# Altium PCB PCB1.PcbDoc
Units mil, origin at the board's own origin, x right, y up, seen from the top; angles counter-clockwise.
Board outline 6000 x 4000 mil, 2 copper layers (Top Layer, Bottom Layer); 223 components, 319 nets, 940 pads, 41 vias.
Unrouted connection lines stored in the file: 552.
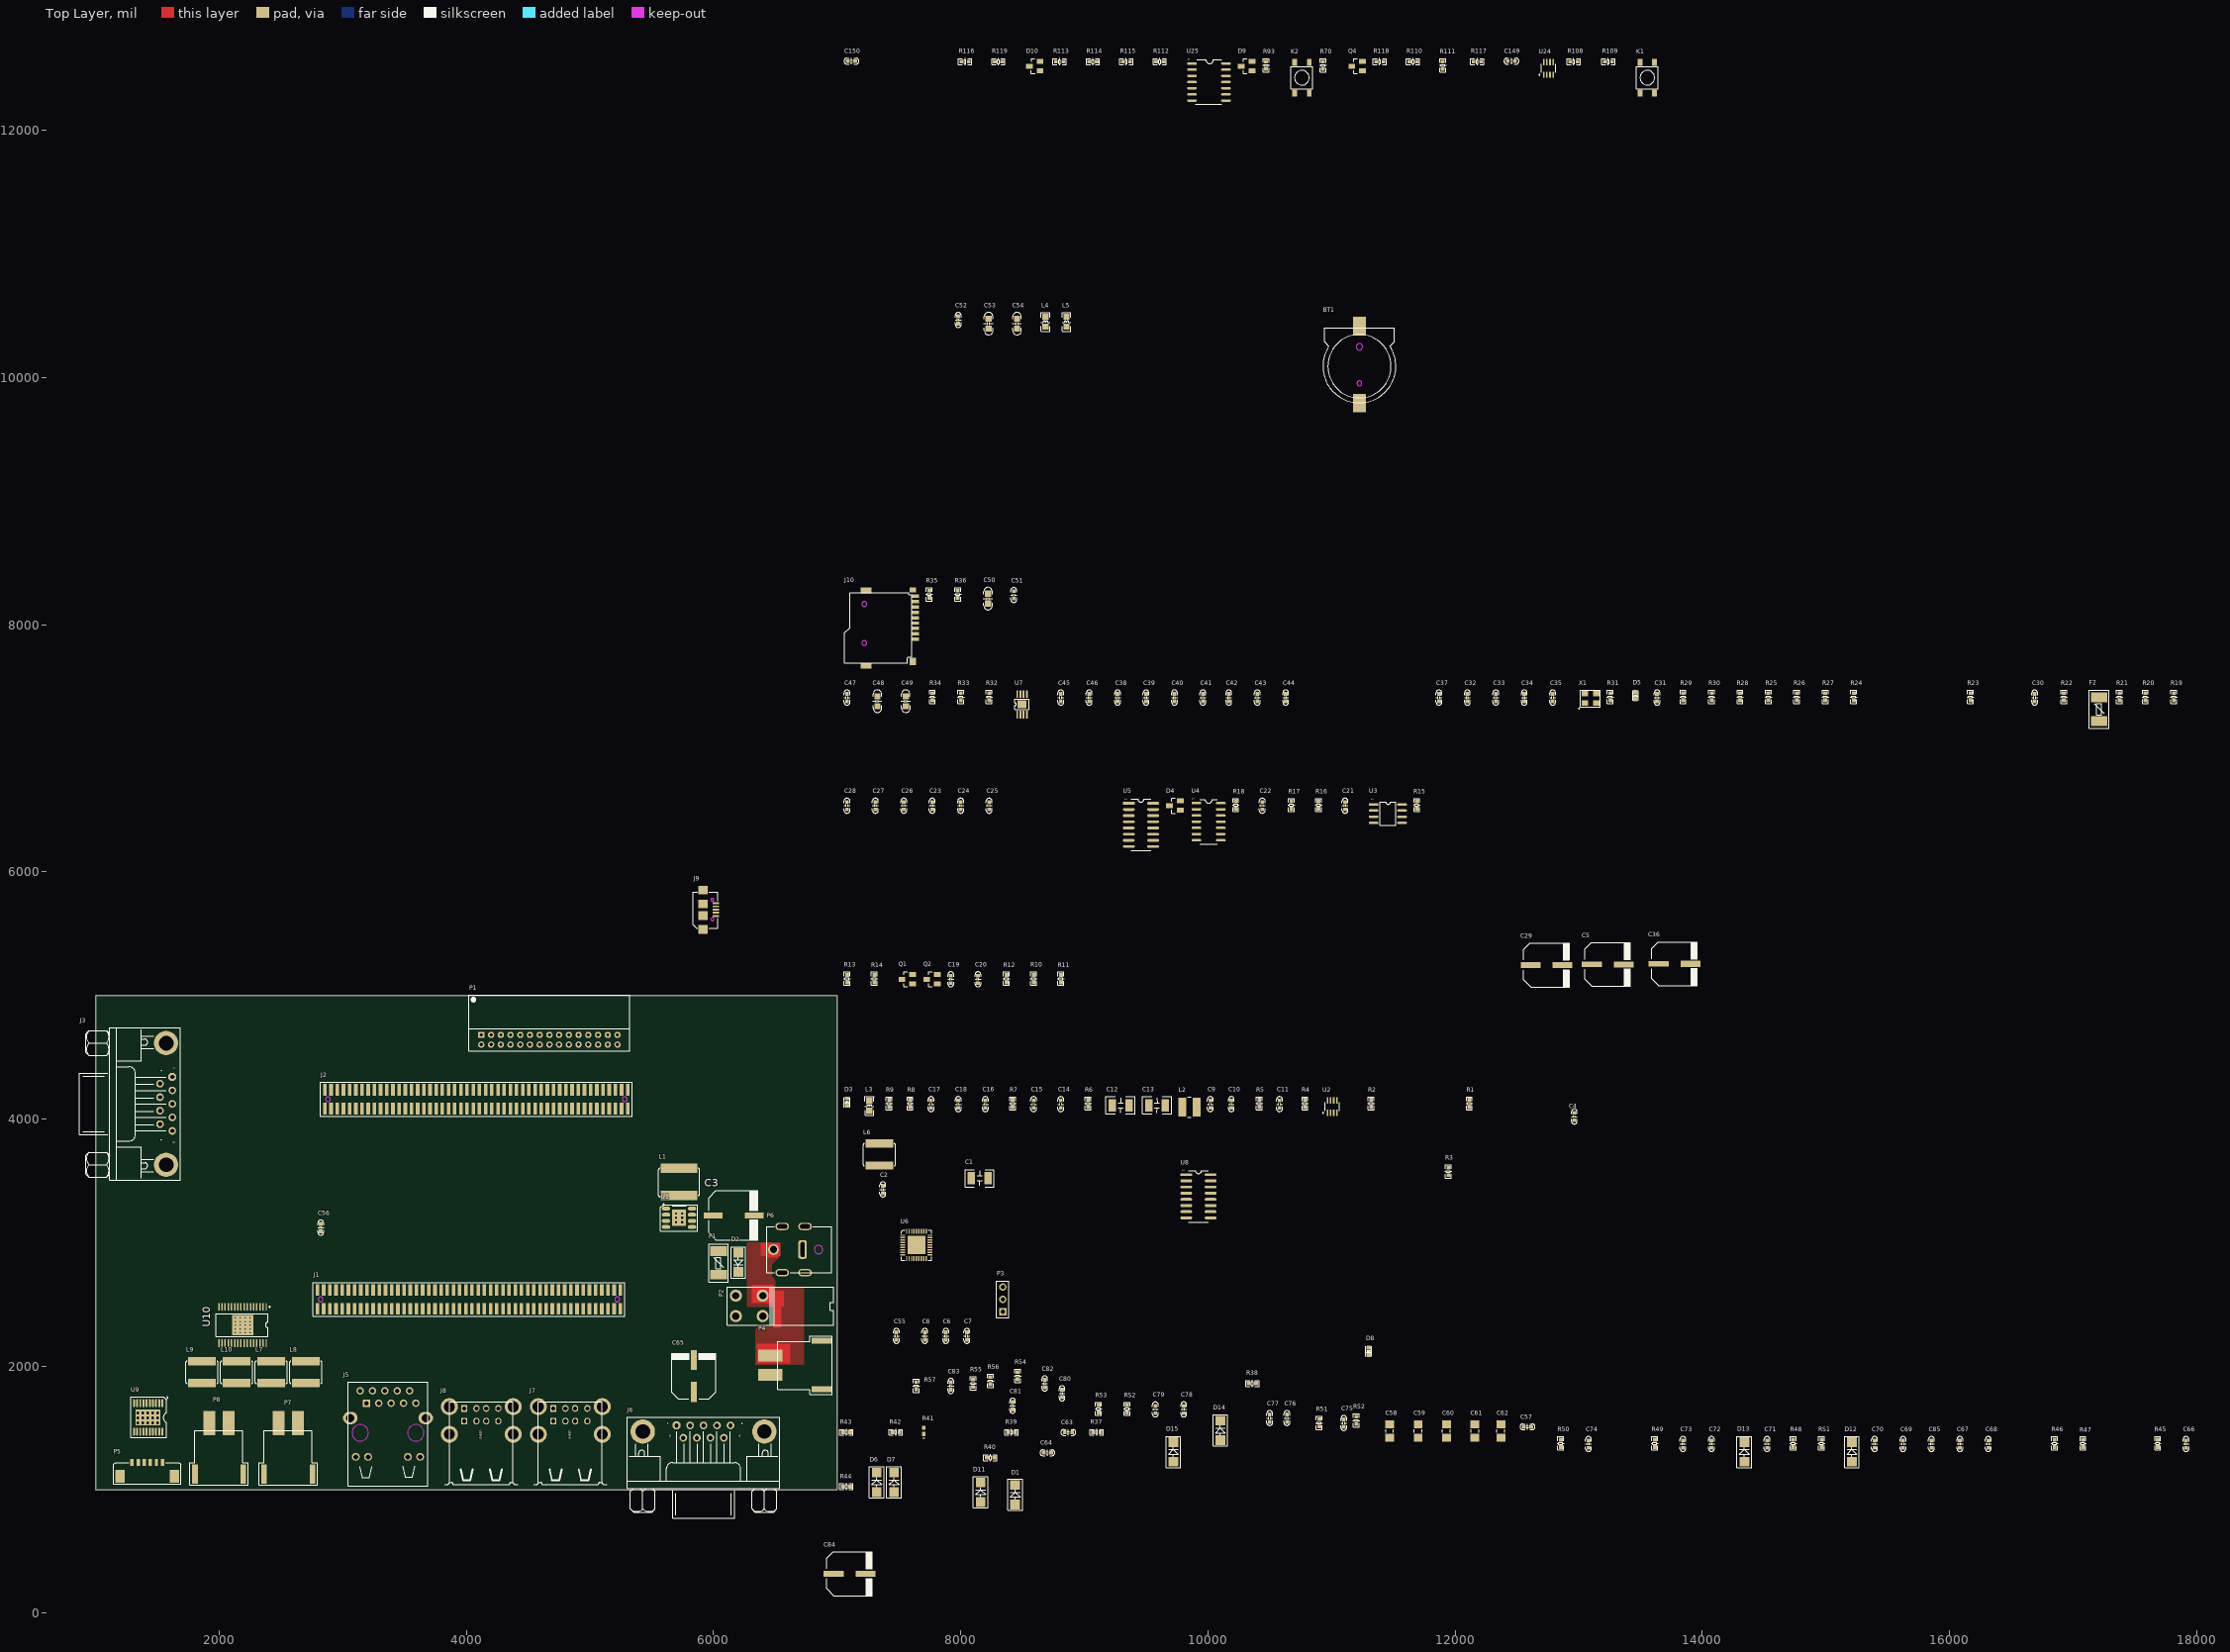
[diagram p0: Top Layer view]
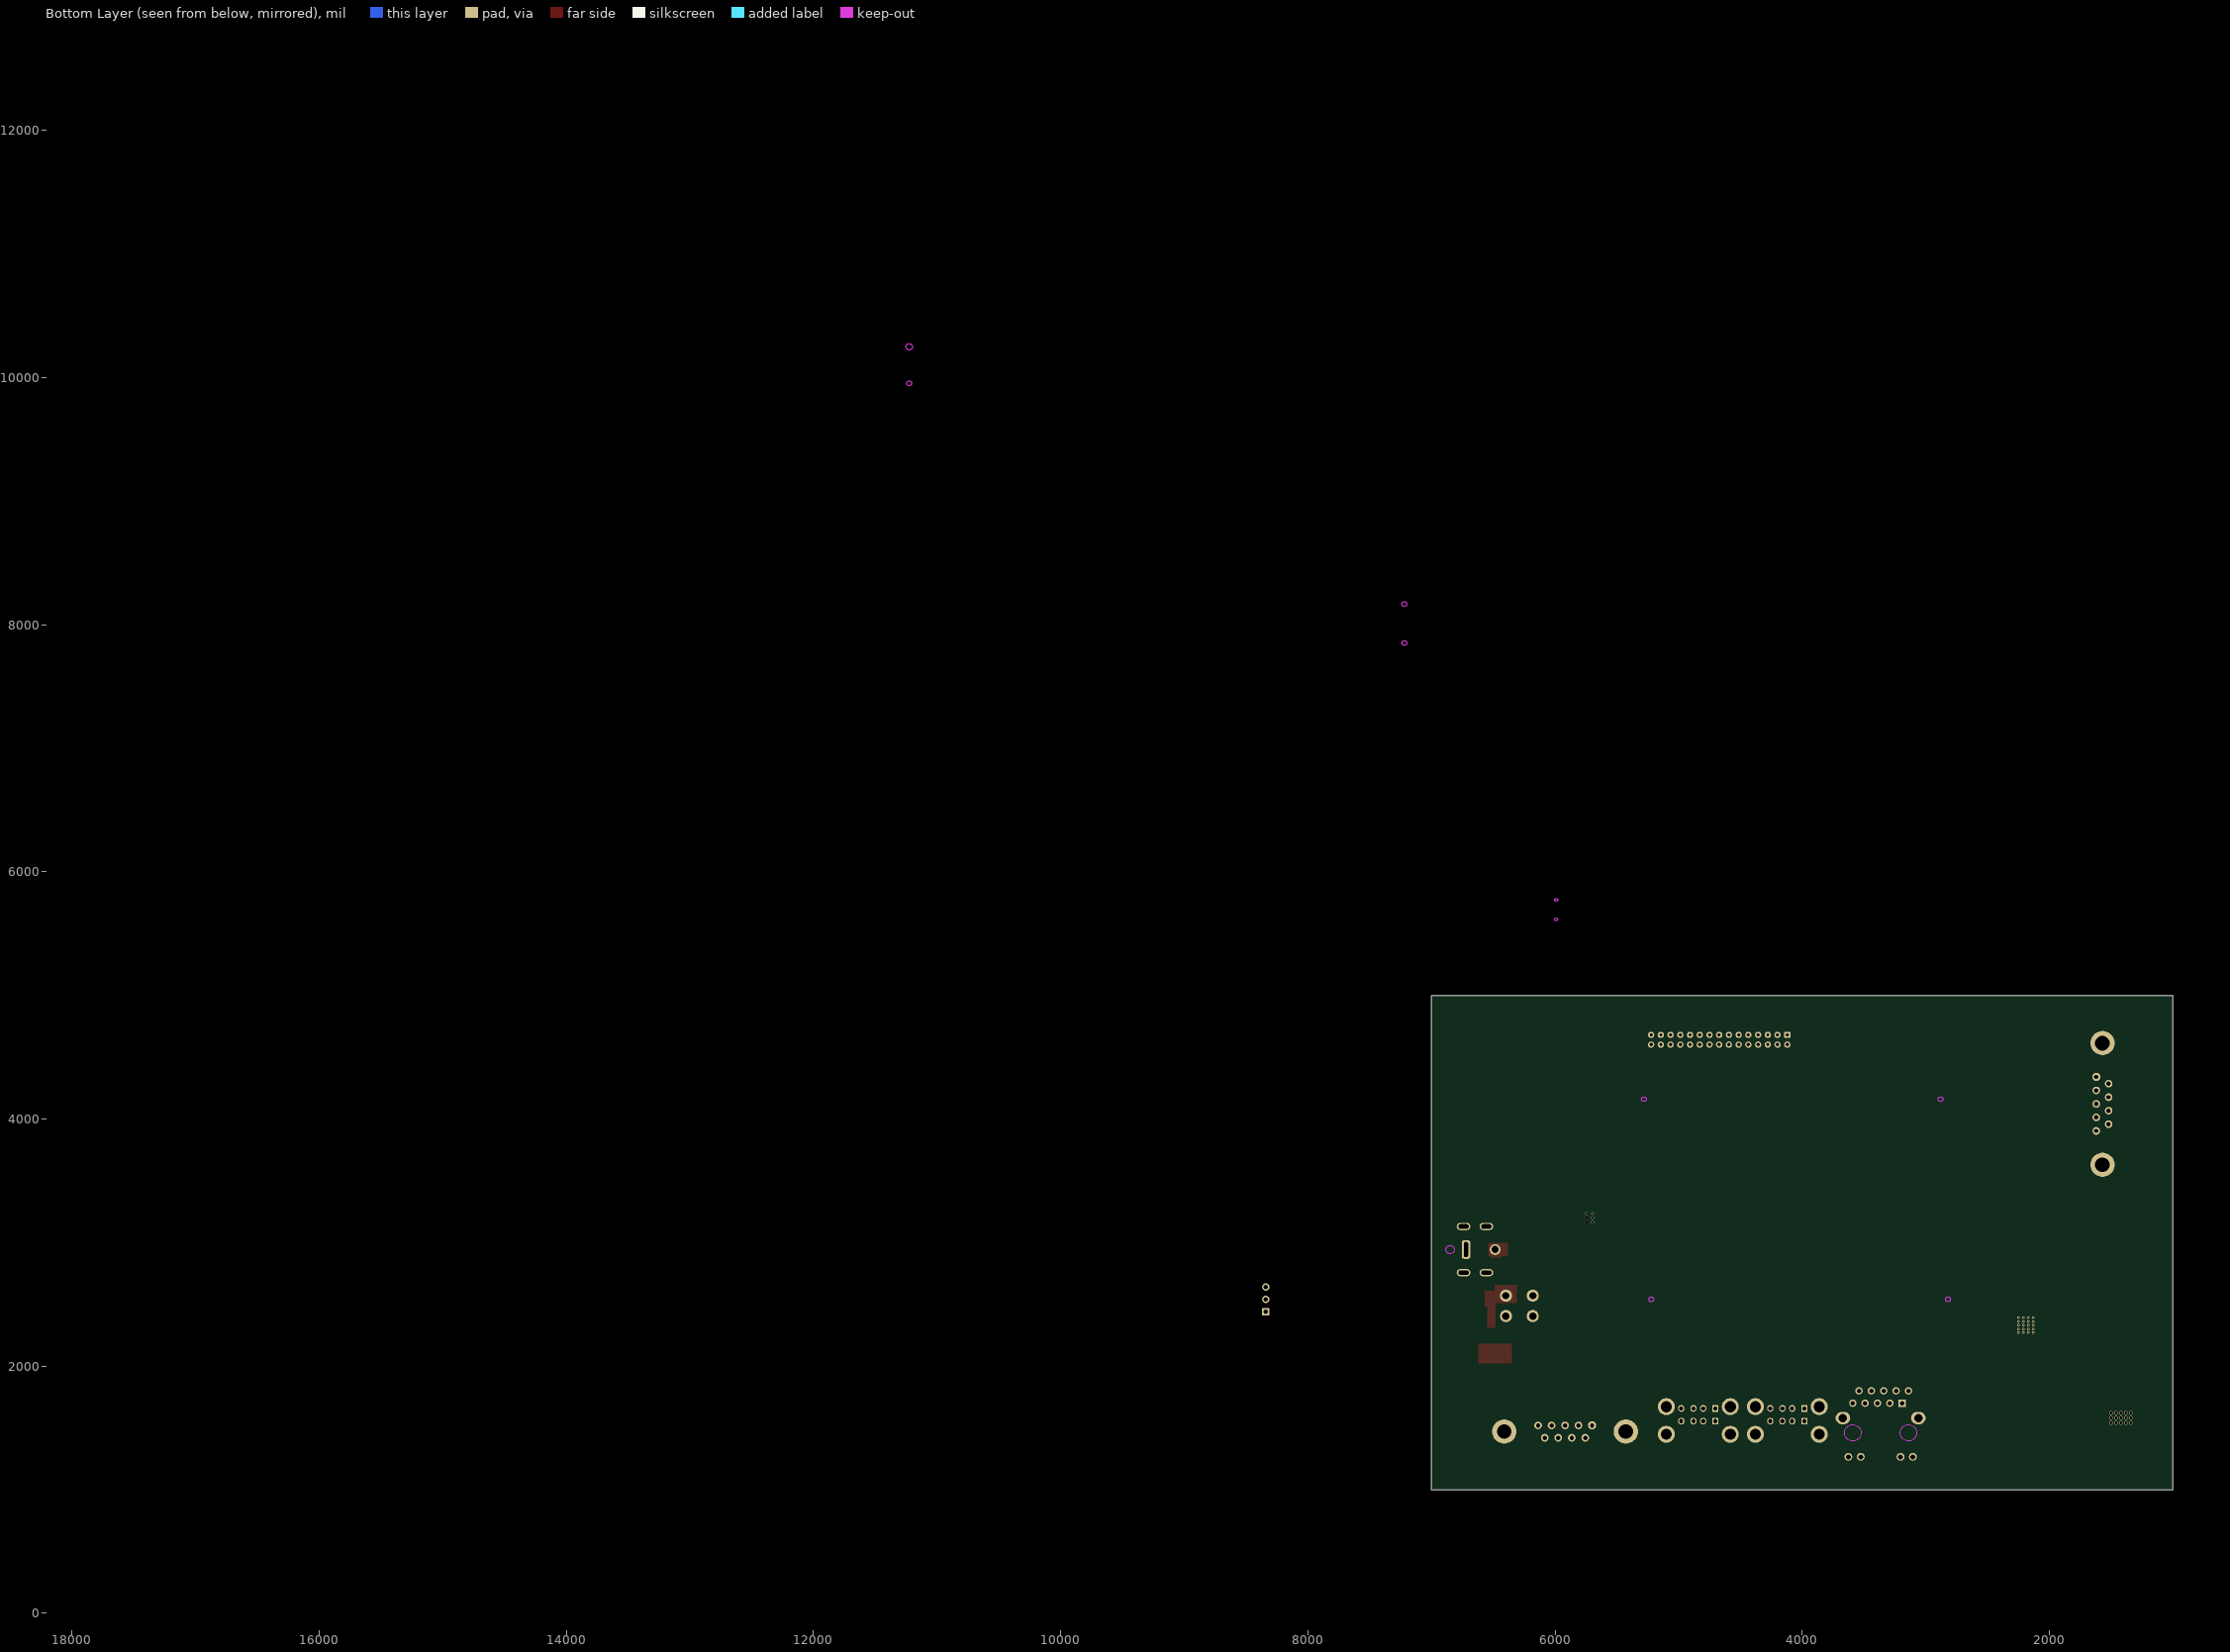
[diagram p1: Bottom Layer view, seen from below]

## Layer stack, top to bottom
Top Layer: signal copper 1.4
Dielectric: dielectric 12.6, FR-4, Dk 4.8
Bottom Layer: signal copper 1.4

## Board outline
1000,1000 7000,1000 7000,5000 1000,5000

## Design rules (kind name [scope] priority, off if disabled: settings)
Clearance [All] p1: gap=10
ComponentClearance [All] p1: gap=10 collisioncheckmode=3 verticalgap=10
DiffPairsRouting [All] p1: maxlimit=10 minlimit=10 mostfreqgap=10 maxuncoupledlength=500
PolygonConnect [All] p1: connectstyle=Relief reliefconductorwidth=10 reliefentries=4 polygonreliefangle="90 Angle"
RoutingVias [All] p1: holewidth=28 width=50 viastyle="Through Hole" minholewidth=28 minwidth=50 maxholewidth=28 maxwidth=50
SolderMaskExpansion [All] p1: expansion=4
TestPointUsage FabricationTestPointUsage [All] p1: valid=0 allowmultiple=FALSE
Testpoint FabricationTestpoint [All] p1: side=3 testpointundercomponent=TRUE minsize=40 maxsize=100 preferedsize=60 minholesize=0 maxholesize=40 preferedholesize=32 testpointgrid=1 style=297 order=0123456789
Width [All] p1: maxlimit=120 minlimit=10 preferedwidth=10 minimp=50.000000 maximp=50.000000 favimp=50.000000
17 further rules are at their usual default settings.

## Classes and differential pairs
component class 10.LVDS: C52 C53 C54 C57 C58 C59 C60 C61 C62 C63 C64 D11 L4 L5 L6 P1 P5 R37 R38 R39 R40 R41 R42 R43 R44 R? U9
component class 12.WTD&RTC: BT1 C149 C150 D9 D10 K1 K2 Q4 R70 R93 R108 R109 R110 R111 R112 R113 R114 R115 R116 R117 R118 R119 U24 U25
component class 8.SATA&TFCARD: C50 C51 J10 R35 R36
component class 5.USB: C29 C30 C31 C32 C33 C34 C35 C36 C37 C38 C39 C40 C41 C42 C43 C44 C45 C46 C47 C48 C49 D5 D6 F2 J7 J8 J9 R19 R20 R21 R22 R23 R24 R25 R26 R27 R28 R29 R30 R31 R32 R33 R34 U6 U7 X1
component class 3.UART: C6 C7 C8 C21 C22 C23 C24 C25 C26 C27 C28 C55 C56 D4 J3 J6 P3 R15 R16 R17 R18 U3 U4 U5 U8
component class 2.ETH: C19 C20 J5 Q1 Q2 R10 R11 R12 R13 R14
component class 1.POWER: C3 C4 C5 C9 C10 C11 C12 C13 C14 C15 C16 C17 C18 D1 D2 D3 D7 D8 F1 L1 L2 L3 P2 P4 P6 R1 R2 R3 R4 R5 R6 R7 R8 R9 U1 U2
component class 0.CONNECTOR: C1 C2 J1 J2
component class 11.EX-MODULE: C65 C66 C67 C68 C69 C70 C71 C72 C73 C74 C75 C76 C77 C78 C79 C80 C81 C82 C83 C84 C85 D12 D13 D14 D15 L7 L8 L9 L10 P7 P8 R45 R46 R47 R48 R49 R50 R51 R52 R53 R54 R55 R56 R57 RS1 RS2 U10
differential pair USB_PORT4: +USB_PORT4_P -USB_PORT4_N
differential pair USB_PORT3: +USB_PORT3_P -USB_PORT3_N
differential pair USB_PORT2: +USB_PORT2_P -USB_PORT2_N
differential pair USB_PORT1: +USB_PORT1_P -USB_PORT1_N
differential pair USB_OTG_D: +USB_OTG_D_P -USB_OTG_D_N
differential pair USB_H1_D: +USB_H1_D_P -USB_H1_D_N
differential pair TRX3: +TRX3_P -TRX3_N
differential pair TRX2: +TRX2_P -TRX2_N
differential pair TRX1: +TRX1_P -TRX1_N
differential pair TRX0: +TRX0_P -TRX0_N
differential pair LVDS1_TX3: +LVDS1_TX3_P -LVDS1_TX3_N
differential pair LVDS1_TX2: +LVDS1_TX2_P -LVDS1_TX2_N
differential pair LVDS1_TX1: +LVDS1_TX1_P -LVDS1_TX1_N
differential pair LVDS1_TX0: +LVDS1_TX0_P -LVDS1_TX0_N
differential pair LVDS1_CLK: +LVDS1_CLK_P -LVDS1_CLK_N
differential pair LVDS0_TX3: +LVDS0_TX3_P -LVDS0_TX3_N
differential pair LVDS0_TX2: +LVDS0_TX2_P -LVDS0_TX2_N
differential pair LVDS0_TX1: +LVDS0_TX1_P -LVDS0_TX1_N
differential pair LVDS0_TX0: +LVDS0_TX0_P -LVDS0_TX0_N
differential pair LVDS0_CLK: +LVDS0_CLK_P -LVDS0_CLK_N

## Components (designator, comment, footprint, x,y, rotation, side; value= is the part's Value field where it differs from the comment)
BT1 "" CR1220 11225,10090 r90 top
C1 "100uF" 1210C 8220,3520 r0 top
C2 "0.1uF" 0603C 7370,3430 r0 top
C3 "Cap Pol3" C10-SMD 6160,3220 r0 top
C4 "Cap" 0603C 12965,4020 r0 top
C5 "Cap Pol3" C8X10-SMD 13235,5250 r0 top
C6 "0.1uF" 0603C 7880,2245 r0 top
C7 "0.1uF" 0603C 8050,2245 r0 top
C8 "0.1uF" 0603C 7710,2245 r0 top
C9 "10uF" 0603C 10020,4120 r0 top
C10 "0.1uF" 0603C 10190,4120 r0 top
C11 "0.1uF" 0603C 10580,4120 r0 top
C12 "100uF" 1210C 9360,4110 r0 top
C13 "100uF" 1210C 9655,4110 r0 top
C14 "10pF" 0603C 8810,4120 r0 top
C15 "0.1uF" 0603C 8590,4120 r0 top
C16 "0.1uF" 0603C 8200,4120 r0 top
C17 "0.1uF" 0603C 7760,4120 r0 top
C18 "22nF" 0603C 7980,4120 r0 top
C19 "0.1uF" 0603C 7920,5130 r0 top
C20 "NC(1uF)" 0603C 8140,5130 r0 top
C21 "0.1uF" 0603C 11110,6535 r0 top
C22 "1nF" 0603C 10440,6535 r0 top
C23 "0.1uF" 0603C 7770,6535 r0 top
C24 "0.1uF" 0603C 8000,6535 r0 top
C25 "0.1uF" 0603C 8230,6535 r0 top
C26 "0.1uF" 0603C 7540,6535 r0 top
C27 "0.1uF" 0603C 7310,6535 r0 top
C28 "0.1uF" 0603C 7080,6535 r0 top
C29 "220uF/16V" C8X10-SMD 12740,5245 r0 top
C30 "0.1uF" 0603C 16690,7410 r0 top
C31 "0.1uF" 0603C 13635,7410 r0 top
C32 "4.7uF" 0603C 12100,7410 r0 top
C33 "0.1uF" 0603C 12330,7410 r0 top
C34 "4.7uF" 0603C 12560,7410 r0 top
C35 "0.1uF" 0603C 12790,7410 r0 top
C36 "220uF/16V" C8X10-SMD 13775,5255 r0 top
C37 "0.1uF" 0603C 11870,7410 r0 top
C38 "18pF" 0603C 9270,7410 r0 top
C39 "18pF" 0603C 9500,7410 r0 top
C40 "0.1uF" 0603C 9730,7410 r0 top
C41 "0.1uF" 0603C 9960,7410 r0 top
C42 "0.1uF" 0603C 10170,7410 r0 top
C43 "0.1uF" 0603C 10400,7410 r0 top
C44 "4.7uF" 0603C 10630,7410 r0 top
C45 "1uF" 0603C 8810,7410 r0 top
C46 "1uF" 0603C 9040,7410 r0 top
C47 "0.1uF" 0603C 7080,7410 r0 top
C48 "22uF" 0805C 7325,7420 r0 top
C49 "22uF" 0805C 7555,7420 r0 top
C50 "22uF" 0805C 8220,8250 r0 top
C51 "0.1uf" 0603C 8430,8240 r0 top
C52 "0.1uF" 0603C 7980,10465 r0 top
C53 "22uF" 0805C 8225,10475 r0 top
C54 "22uF" 0805C 8455,10475 r0 top
C55 "0.1uF" 0603C 7480,2245 r0 top
C56 "0.1uF" 0603C 2820,3120 r180 top
C57 "Cap" 0603C 12585,1510 r90 top
C58 "Cap" 3216[1206] 11470,1475 r90 top
C59 "Cap" 3216[1206] 11700,1475 r90 top
C60 "Cap" 3216[1206] 11930,1475 r90 top
C61 "Cap" 3216[1206] 12160,1475 r90 top
C62 "Cap" 3216[1206] 12370,1475 r90 top
C63 "Cap" 0603C 8870,1465 r90 top
C64 "Cap" 0603C 8700,1300 r90 top
C65 "470U/35V" C8X10-SMD 5840,1920 r90 top
C66 "224" 0603C 17915,1370 r0 top
C67 "105" 0603C 16085,1370 r0 top
C68 "224" 0603C 16315,1370 r0 top
C69 "301" 0603C 15625,1370 r0 top
C70 "105" 0603C 15395,1370 r0 top
C71 "105" 0603C 14525,1370 r0 top
C72 "105" 0603C 14075,1370 r0 top
C73 "105" 0603C 13845,1370 r0 top
C74 "224" 0603C 13080,1370 r0 top
C75 "224" 0603C 11100,1540 r0 top
C76 "105" 0603C 10640,1580 r0 top
C77 "105" 0603C 10500,1580 r0 top
C78 "106" 0603C 9805,1650 r0 top
C79 "301" 0603C 9575,1650 r0 top
C80 "105" 0603C 8820,1780 r0 top
C81 "105" 0603C 8420,1680 r0 top
C82 "224" 0603C 8680,1860 r0 top
C83 "224" 0603C 7920,1840 r0 top
C84 "470U/35V" C8X10-SMD 7100,320 r0 top
C85 "106" 0603C 15855,1370 r0 top
C149 "0.1uF(NC)" 0603C 12455,12560 r90 top
C150 "0.1uF" 0603C 7115,12560 r90 top
D1 "SMAJ16A" ? 8440,960 r90 top
D2 "SS54" ? 6200,2840 r270 top
D3 "发光二极管" 0603D 7080,4135 r0 top
D4 "BAT54C" SOT-23 9790,6575 r0 top
D5 "发光二极管" 0603D 13460,7425 r0 top
D6 "SS24(NC)" ? 7320,1060 r90 top
D7 "SS54" ? 7460,1060 r90 top
D8 "发光二极管" 0603D 11300,2120 r0 top
D9 "BAT54C" SOT-23 10370,12560 r0 top
D10 "BAT54C" SOT-23 8655,12560 r0 top
D11 "SS210" ? 8160,980 r90 top
D12 "M7" ? 15210,1305 r90 top
D13 "M7" ? 14340,1305 r90 top
D14 "M7" ? 10100,1480 r90 top
D15 "M7" ? 9720,1305 r90 top
F1 "Fuse Thermal" 1812F 6040,2740 r90 top
F2 "1A  FUSE" 1812F 17210,7220 r90 top
J1 "CON50X2" IDC50X2-1.27MM_SMT 4020,2540 r180 top
J2 "CON50X2" IDC50X2-1.27MM_SMT 4080,4160 r180 top
J3 "DB9" DB-9/M 1620,4340 r0 top
J5 "48F-01GY2DPL2NL" RJ45C-48F-01GY2DPL2NL 3140,1800 r0 top
J6 "DB9" DB-9/M 5700,1520 r90 top
J7 "USB-D" USB-D 4840,1560 r180 top
J8 "USB-D" USB-D 4120,1560 r180 top
J9 "USB_AB" MICROUSB 5990,5615 r90 top
J10 "TF-CARD" TF-CARD 7560,7940 r0 top
K1 "KEY" SS-SPB-4.5 13555,12425 r90 top
K2 "KEY" SS-SPB-4.5 10760,12425 r90 top
L1 "Inductor" L-8040 5720,3380 r90 top
L2 "2.2uH" SDRH0420 9850,4095 r0 top
L3 "电感" 0805L 7260,4145 r0 top
L4 "NC" 0805L 8685,10490 r0 top
L5 "电感" 0805L 8855,10490 r0 top
L6 "Inductor" L-6045 7340,3800 r270 top
L7 "10UH" L-6045 2420,2040 r270 top
L8 "10UH" L-6045 2700,2040 r270 top
L9 "10UH" L-6045 1860,2040 r270 top
L10 "10UH" L-6045 2140,2040 r270 top
P1 "Header 15X2" 2.0-15P*2 4120,4680 r0 top
P2 "POWIN" 5569 6180,2570 r270 top
P3 "TTL" HDR1X3 8340,2440 r90 top
P4 "POW-IN" VH3.96-2P-SMT 6460,1930 r90 top
P5 "Header 6" 1.25MM-6P 1540,1220 r0 top
P6 "POW-IN" DC-5525 6740,3130 r270 top
P7 "CON2" VH3.96-2P-SMT 2480,1540 r0 top
P8 "CON2" VH3.96-2P-SMT 1920,1540 r0 top
Q1 "9012" SOT-23 7625,5170 r0 top
Q2 "9012" SOT-23 7825,5170 r0 top
Q4 "9013" SOT-23 11265,12560 r0 top
R1 "Res1" 0603R 12115,4125 r0 top
R2 "Res1" 0603R 11320,4125 r0 top
R3 "Res1" 0603R 11945,3575 r0 top
R4 "20R" 0603R 10785,4125 r0 top
R5 "100K" 0603R 10415,4125 r0 top
R6 "40.2K 1%" 0603R 9030,4125 r0 top
R7 "24K 1%" 0603R 8420,4125 r0 top
R8 "13K 1%" 0603R 7590,4125 r0 top
R9 "1K" 0603R 7420,4125 r0 top
R10 "1K" 0603R 8590,5135 r0 top
R11 "1K" 0603R 8810,5135 r0 top
R12 "NC(0)" 0603R 8370,5135 r0 top
R13 "4.7K" 0603R 7080,5135 r0 top
R14 "4.7K" 0603R 7300,5135 r0 top
R15 "1K" 0603R 11690,6540 r0 top
R16 "120(NC)" 0603R 10895,6540 r0 top
R17 "1K" 0603R 10675,6540 r0 top
R18 "22K" 0603R 10225,6540 r0 top
R19 "0R" 0603R 17815,7415 r0 top
R20 "10K" 0603R 17585,7415 r0 top
R21 "10K" 0603R 17375,7415 r0 top
R22 "10K" 0603R 16925,7415 r0 top
R23 "10K" 0603R 16170,7415 r0 top
R24 "100K" 0603R 15225,7415 r0 top
R25 "100K" 0603R 14535,7415 r0 top
R26 "100K" 0603R 14765,7415 r0 top
R27 "100K" 0603R 14995,7415 r0 top
R28 "12K 1%" 0603R 14305,7415 r0 top
R29 "1K" 0603R 13845,7415 r0 top
R30 "100K" 0603R 14075,7415 r0 top
R31 "1M" 0603R 13255,7415 r0 top
R32 "10K(NC)" 0603R 8230,7415 r0 top
R33 "33R" 0603R 8000,7415 r0 top
R34 "33R" 0603R 7770,7415 r0 top
R35 "10K" 0603R 7745,8245 r0 top
R36 "10K" 0603R 7975,8245 r0 top
R37 "Res1" 0603R 9100,1465 r90 top
R38 "Res1" 0603R 10360,1860 r90 top
R39 "Res1" 0603R 8410,1465 r90 top
R40 "Res1" 0603R 8240,1260 r90 top
R41 "Res1" 0402 7700,1475 r90 top
R42 "Res1" 0603R 7475,1465 r90 top
R43 "Res1" 0603R 7075,1465 r90 top
R44 "Res1" 0603R 7075,1025 r90 top
R45 "20K" 0603R 17685,1375 r0 top
R46 "330R" 0603R 16850,1375 r0 top
R47 "4K7" 0603R 17080,1375 r0 top
R48 "4K7" 0603R 14735,1375 r0 top
R49 "100K" 0603R 13615,1375 r0 top
R50 "20K" 0603R 12855,1375 r0 top
R51 "330R" 0603R 10900,1540 r0 top
R52 "4K7" 0603R 11200,1560 r0 top
R53 "4K7" 0603R 9115,1655 r0 top
R54 "0R" 0603R 8460,1920 r0 top
R55 "10K" 0603R 8100,1860 r0 top
R56 "4K7" 0603R 8240,1880 r0 top
R57 "10K" 0603R 7640,1840 r0 top
R70 "1K(NC)" 0603R 10930,12525 r0 top
R93 "10K" 0603R 10470,12525 r0 top
R108 "10K(NC)" 0603R 12960,12555 r90 top
R109 "10K(NC)" 0603R 13240,12555 r90 top
R110 "10K(NC)" 0603R 11660,12555 r90 top
R111 "10K(NC)" 0603R 11900,12525 r0 top
R112 "4.7K(NC)" 0603R 9610,12555 r90 top
R113 "4.7K(NC)" 0603R 8800,12555 r90 top
R114 "10K" 0603R 9070,12555 r90 top
R115 "10K" 0603R 9340,12555 r90 top
R116 "0(NC)" 0603R 8035,12555 r90 top
R117 "10k" 0603R 12180,12555 r90 top
R118 "10k" 0603R 11390,12555 r90 top
R119 "0(NC)" 0603R 8305,12555 r90 top
RS1 "NC" 0603R 14965,1375 r0 top
RS2 "NC" 0603R 9345,1655 r0 top
U1 "LM22676" SOP8-POW 5720,3200 r0 top
U2 "MP1498DJ" TSOT23-8 11005,4100 r0 top
U3 "MAX485ESA" SOP8-1.27 11340,6545 r0 top
U4 "SN74HCT14D" SOIC14-1.27 10005,6405 r0 top
U5 "SP3232EEN" SOIC16-1.27 9455,6405 r0 top
U6 "USB2514BI" QFN-36 7640,2980 r0 top
U7 "TPS2061DGN(NC)" MSOP-8 8495,7355 r90 top
U8 "SP3232EEN" SOIC16-1.27 9920,3400 r0 top
U9 "TPS61194" HTTSOP-20 1540,1700 r270 top
U10 "TPA3116" HTSSOP-32 2380,2480 r180 top
U24 "MAX6369KAV+T(NC)" TSOT23-8 12755,12500 r0 top
U25 "RX8025-SA" SOP14-1.27 9870,12540 r0 top
X1 "24M" OSC4-3225 13050,7365 r0 top

## Footprints (in the part's own frame and the unit in brackets; to place one, negate y for a bottom-side part, rotate by r counter-clockwise, add the part's x,y. Pads: shape width x height; smd on the part's side, far side on the other; paste and mask are expansions set on the pad)
1.25MM-6P [mm]
  rect 1.9x2.6 smd: 0(-8.7,-2.835) 0(2.45,-2.835)
  rect 0.7x1.4 smd: 1(-6.25,0) 2(-5,0) 3(-3.75,0) 4(-2.5,0) 5(-1.25,0) 6(0,0)
  silkscreen extent -10.03,-4.44 3.81,0
2.0-15P*2 [mm]
  rect 1.301x1.301 hole 0.68: 1(0,0)
  round 1.301 hole 0.68: 2(0,-2) 3(2,0) 4(2,-2) 5(4,0) 6(4,-2) 7(6,0) 8(6,-2) 9(8,0) 10(8,-2) 11(10,0) 12(10,-2) 13(12,0) 14(12,-2) 15(14,0) 16(14,-2) 17(16,0) 18(16,-2) 19(18,0) 20(18,-2) 21(20,0) 22(20,-2) 23(22,0) 24(22,-2) 25(24,0) 26(24,-2) 27(26,0) 28(26,-2) 29(28,0) 30(28,-2)
  silkscreen extent -2.5,-3.3 30.5,8.15
0402 [mm] "Chip Capacitor; Body 1.0 x 0.5 mm (LxW typ)"
  rect 0.9x0.7 smd: 1(-0.65,0) 2(0.65,0)
  silkscreen extent -1.4,-0.25 -1.4,0.25
0603C [mil]
  rect 31.5x30 smd: 1(-1.02,29.52) 2(-1.02,-30.48)
  silkscreen extent -25,-61 23,60
0603D [mil]
  rect 35.43x30 smd: A(0,-30) K(0,30)
  silkscreen extent -24,-40 24,39
0603R [mil]
  rect 31.5x30 smd: 1(0.04,30.32) 2(0.04,-29.68)
  silkscreen extent -28,-53 28,54
0805C [mil]
  rect 50x50 smd: 1(0,0) 2(0,-80)
  silkscreen extent -39,-131 35,51
0805L [mil]
  rect 50x50 smd: 1(0,0) 2(0,-80)
  silkscreen extent -35,-115 36,35
1210C [mil]
  rect 60x100 smd: 1(0,0) 2(-135,0)
  silkscreen extent -185,-70 50,70
1812F [mm]
  rect 2x3.4 smd: 1(0,0) 2(4.85,0)
  silkscreen extent -1.5,-2.03 6.35,2.03
3216[1206] [mm] "Chip Resistor; Body 3.2 x 1.6 mm (LxW typ)"
  rect 1.6x1.8 smd: 1(-1.4,0) 2(1.4,0)
  silkscreen extent -0.3,-0.8 0.3,0.8
5569 [mm]
  round 2.5 hole 1.524: 1(0,0) 2(4.2,0) 3(4.2,5.5) 4(0,5.5)
  silkscreen extent -1.78,-1.78 6.1,20.07
C8X10-SMD [mm]
  rect 4.1x1.148 smd: 1(-3.277,0)
  rect 4.1x1.25 smd: 2(3.277,0)
  silkscreen extent -4.7,-4.5 4.7,4.5, body extent -4.65,-4.25 4.65,4.25, height 10.5
C10-SMD [mm]
  rect 3.85x1.25 smd: 1(-4.191,0) 2(4.318,0)
  silkscreen extent -5.08,-5.08 5.08,5.08
CR1220 [mm]
  rect 3.8x2.6 smd: 1(8.23,0) 2(-7.57,0)
  Keep-Out Layer circle w0.1: c4,0 r0.65
  Keep-Out Layer circle w0.1: c-3.5,0 r0.5
  silkscreen extent -7.5,-7.5 7.94,7.5
DB-9/M [mil]
  oct 62x62 hole 35: 1(0,0)
  round 62 hole 35: 2(0,-109.17) 3(0,-218.33) 4(0,-327.5) 5(0,-436.67) 6(-100,-55) 7(-100,-164.17) 8(-100,-273.33) 9(-100,-382.5)
  round 196.67 hole 118.33: BO1(-50,-710.83) BO2(-50,273.33)
  silkscreen extent -750,-835 67,398
DC-5525 [mm]
  oval 1.5x2.8 hole 0.85 slot 2.06 at 90 deg: 1(0,0) 1(0,-4.7) 1(9.5,-4.7) 1(9.5,0)
  rrect50% 3.8x1.75 hole 0.83 slot 3.05 at 0 deg: 1(4.75,-0.5)
  round 2.2 hole 1.5: 2(4.75,-6.5)
  Keep-Out Layer circle w0.2: c4.75,2.75 r0.86
  silkscreen extent 0,-7.87 9.53,5.5
HDR1X3 [mm] "Connector; Header; 3 Position"
  rect 1.5x1.5 hole 0.9: 1(0,0)
  round 1.5 hole 0.9: 2(2.54,0) 3(5.08,0)
  silkscreen extent -1.27,-1.27 6.35,1.27
HTSSOP-32 [mm]
  rect 0.3x1.6 smd: 1(0,0) 2(0.65,0) 3(1.3,0) 4(1.95,0) 5(2.6,0) 6(3.25,0) 7(3.9,0) 8(4.55,0) 9(5.2,0) 10(5.85,0) 11(6.5,0) 12(7.15,0) 13(7.8,0) 14(8.45,0) 15(9.1,0) 16(9.75,0) 17(9.75,7.5) 18(9.1,7.5) 19(8.45,7.5) 20(7.8,7.5) 21(7.15,7.5) 22(6.5,7.5) 23(5.85,7.5) 24(5.2,7.5) 25(4.55,7.5) 26(3.9,7.5) 27(3.25,7.5) 28(2.6,7.5) 29(1.95,7.5) 30(1.3,7.5) 31(0.65,7.5) 32(0,7.5)
  rect 4.36x4.11 smd: 33(4.875,3.75)
  silkscreen extent -0.83,-0.12 10.29,6.1
HTTSOP-20 [mm]
  oval 1.65x0.4 smd: 1(0,0) 2(0,-0.65) 3(0,-1.3) 4(0,-1.95) 5(0,-2.6) 6(0,-3.25) 7(0,-3.9) 8(0,-4.55) 9(0,-5.2) 10(0,-5.85) 11(5.842,-5.85) 12(5.842,-5.2) 13(5.842,-4.55) 14(5.842,-3.9) 15(5.842,-3.25) 16(5.842,-2.6) 17(5.842,-1.95) 18(5.842,-1.3) 19(5.842,-0.65) 20(5.842,0)
  rect 3.3x5.08 smd: 21(2.921,-3)
  silkscreen extent -1.32,-6.5 7.07,1.14, body extent 0.64,-6.2 5.08,0.28, height 2.65
IDC50X2-1.27MM_SMT [mm]
  rect 0.74x2.4 smd: 1(-31.115,-1.95) 2(-31.115,1.95) 3(-29.845,-1.95) 4(-29.845,1.95) 5(-28.575,-1.95) 6(-28.575,1.95) 7(-27.305,-1.95) 8(-27.305,1.95) 9(-26.035,-1.95) 10(-26.035,1.95) 11(-24.765,-1.95) 12(-24.765,1.95) 13(-23.495,-1.95) 14(-23.495,1.95) 15(-22.225,-1.95) 16(-22.225,1.95) 17(-20.955,-1.95) 18(-20.955,1.95) 19(-19.685,-1.95) 20(-19.685,1.95) 21(-18.415,-1.95) 22(-18.415,1.95) 23(-17.145,-1.95) 24(-17.145,1.95) 25(-15.875,-1.95) 26(-15.875,1.95) 27(-14.605,-1.95) 28(-14.605,1.95) 29(-13.335,-1.95) 30(-13.335,1.95) 31(-12.065,-1.95) 32(-12.065,1.95) 33(-10.795,-1.95) 34(-10.795,1.95) 35(-9.525,-1.95) 36(-9.525,1.95) 37(-8.255,-1.95) 38(-8.255,1.95) 39(-6.985,-1.95) 40(-6.985,1.95) 41(-5.715,-1.95) 42(-5.715,1.95) 43(-4.445,-1.95) 44(-4.445,1.95) 45(-3.175,-1.95) 46(-3.175,1.95) 47(-1.905,-1.95) 48(-1.905,1.95) 49(-0.635,-1.95) 50(-0.635,1.95) 51(0.635,-1.95) 52(0.635,1.95) 53(1.905,-1.95) 54(1.905,1.95) 55(3.175,-1.95) 56(3.175,1.95) 57(4.445,-1.95) 58(4.445,1.95) 59(5.715,-1.95) 60(5.715,1.95) 61(6.985,-1.95) 62(6.985,1.95) 63(8.255,-1.95) 64(8.255,1.95) 65(9.525,-1.95) 66(9.525,1.95) 67(10.795,-1.95) 68(10.795,1.95) 69(12.065,-1.95) 70(12.065,1.95) 71(13.335,-1.95) 72(13.335,1.95) 73(14.605,-1.95) 74(14.605,1.95) 75(15.875,-1.95) 76(15.875,1.95) 77(17.145,-1.95) 78(17.145,1.95) 79(18.415,-1.95) 80(18.415,1.95) 81(19.685,-1.95) 82(19.685,1.95) 83(20.955,-1.95) 84(20.955,1.95) 85(22.225,-1.95) 86(22.225,1.95) 87(23.495,-1.95) 88(23.495,1.95) 89(24.765,-1.95) 90(24.765,1.95) 91(26.035,-1.95) 92(26.035,1.95) 93(27.305,-1.95) 94(27.305,1.95) 95(28.575,-1.95) 96(28.575,1.95) 97(29.845,-1.95) 98(29.845,1.95) 99(31.115,-1.95) 100(31.115,1.95)
  Keep-Out Layer circle w0.203: c-30.48,0 r0.5
  Keep-Out Layer circle w0.203: c30.48,0 r0.5
  silkscreen extent -32,-3.5 32,3.5
L-6045 [mm]
  rect 1.7x5.7 smd: 1(0,0) 2(4.5,0)
  silkscreen extent 0,-3.3 4.57,3.3
L-8040 [mm]
  rect 1.9x7.5 smd: 1(0,0) 2(5.6,0)
  silkscreen extent -0.25,-4.19 5.6,4.19
MICROUSB [mm]
  rect 1.8x1.9 smd: 0(-2.098,1.905) 0(0.762,1.905) 0(3.175,1.905) 0(6.002,1.905)
  rect 0.4x1.35 smd: 1(3.302,-0.745) 2(2.652,-0.745) 3(2.002,-0.745) 4(1.352,-0.745) 5(0.702,-0.745)
  Keep-Out Layer circle w0.1: c0.006,0 r0.3
  Keep-Out Layer circle w0.1: c4.019,0 r0.3
  silkscreen extent -1.78,-1.14 5.59,3.94
MSOP-8 [mm]
  rect 1.6x0.4 smd: 1(-2.1,0.975) 2(-2.1,0.325) 3(-2.1,-0.325) 4(-2.1,-0.975) 5(2.1,-0.975) 6(2.1,-0.325) 7(2.1,0.325) 8(2.1,0.975)
  rect 1.57x1.89 smd: 9(0,0)
  silkscreen extent -1.1,-1.5 1.1,1.5
OSC4-3225 [mm]
  rect 1.3x1.1 smd: 1(0,0) 2(2.3,0) 3(2.3,1.9) 4(0,1.9)
  silkscreen extent -1.28,-1.19 3.17,2.67
QFN-36 [mm]
  rect 1x0.28 smd: 1(-2.777,2) 2(-2.777,1.5) 3(-2.777,1) 4(-2.777,0.5) 5(-2.777,0) 6(-2.777,-0.5) 7(-2.777,-1) 8(-2.777,-1.5) 9(-2.777,-2) 19(2.823,-2) 20(2.823,-1.5) 21(2.823,-1) 22(2.823,-0.5) 23(2.823,0) 24(2.823,0.5) 25(2.823,1) 26(2.823,1.5) 27(2.823,2)
  rect 0.28x1 smd: 10(-1.977,-2.8) 11(-1.477,-2.8) 12(-0.977,-2.8) 13(-0.477,-2.8) 14(0.023,-2.8) 15(0.523,-2.8) 16(1.023,-2.8) 17(1.523,-2.8) 18(2.023,-2.8) 28(2.023,2.8) 29(1.523,2.8) 30(1.023,2.8) 31(0.523,2.8) 32(0.023,2.8) 33(-0.477,2.8) 34(-0.977,2.8) 35(-1.477,2.8) 36(-1.977,2.8)
  rect 3.7x3.7 smd: 37(0.023,0)
  silkscreen extent -3.08,-3.1 3.12,3.1
RJ45C-48F-01GY2DPL2NL [mm]
  round 1.5 hole 0.9: 1(0,0) 3(2.54,0) 4(3.81,-2.54) 5(5.08,0) 6(6.35,-2.54) 7(7.62,0) 8(8.89,-2.54) 9(10.16,0) 10(11.43,-2.54)
  rect 1.5x1.5 hole 0.9: 2(1.27,-2.54)
  round 1.6 hole 1: 11(-0.915,-13.565) 12(1.625,-13.565) 13(9.805,-13.565) 14(12.345,-13.565)
  oval 3x2.54 hole 1.7: 15(-2.035,-5.59) 16(13.465,-5.59)
  Keep-Out Layer circle w0.178: c0,-8.64 r1.7
  Keep-Out Layer circle w0.178: c11.43,-8.64 r1.7
  silkscreen extent -2.48,-19.54 13.92,1.77
SDRH0420 [mm]
  rect 1.6x3.9 smd: 1(-1.45,0) 2(1.45,0)
  silkscreen extent -0.35,-2.1 0.35,2.1
SOIC14-1.27 [mm]
  rect 2x0.5 smd: 1(-2.5,3.81)
  oval 2x0.5 smd: 2(-2.5,2.54) 3(-2.5,1.27) 4(-2.5,0) 5(-2.5,-1.27) 6(-2.5,-2.54) 7(-2.5,-3.81) 8(2.5,-3.81) 9(2.5,-2.54) 10(2.5,-1.27) 11(2.5,0) 12(2.5,1.27) 13(2.5,2.54) 14(2.5,3.81)
  silkscreen extent -1.78,-4.57 1.78,4.57
SOIC16-1.27 [mm]
  rect 2.4x0.6 smd: 1(-2.432,3.787)
  oval 2.4x0.6 smd: 2(-2.432,2.517) 3(-2.432,1.247) 4(-2.432,-0.023) 5(-2.432,-1.293) 6(-2.432,-2.563) 7(-2.432,-3.833) 8(-2.432,-5.103) 9(2.568,-5.103) 10(2.568,-3.833) 11(2.568,-2.563) 12(2.568,-1.293) 13(2.568,-0.023) 14(2.568,1.247) 15(2.568,2.517) 16(2.568,3.787)
  silkscreen extent -1.93,-5.96 2.07,4.64
SOP8-1.27 [mm]
  rect 2x0.5 smd: 1(0,0)
  oval 2x0.5 smd: 2(0,-1.27) 3(0,-2.54) 4(0,-3.81) 5(5.85,-3.81) 6(5.85,-2.54) 7(5.85,-1.27) 8(5.85,0)
  silkscreen extent 1.35,-4.29 4.54,0.53
SOP8-POW [mm]
  oval 1.7x0.8 smd: 1(-2.675,1.905) 2(-2.675,0.635) 3(-2.675,-0.635) 4(-2.675,-1.905) 5(2.675,-1.905) 6(2.675,-0.635) 7(2.675,0.635) 8(2.675,1.905)
  rect 2.8x3.4 smd: 6(0,0)
  silkscreen extent -3.78,-2.7 3.77,2.82
SOP14-1.27 [mm]
  rect 2x0.5 smd: 1(0,0)
  oval 2x0.5 smd: 2(0,-1.27) 3(0,-2.54) 4(0,-3.81) 5(0,-5.08) 6(0,-6.35) 7(0,-7.62) 8(7,-7.62) 9(7,-6.35) 10(7,-5.08) 11(7,-3.81) 12(7,-2.54) 13(7,-1.27) 14(7,0)
  silkscreen extent 0.76,-8.38 6.1,0.76
SOT-23 [mil]
  rect 55x40 smd: 1(-14.05,-78.06) 2(-14.05,-2.06) 3(-101.05,-41.06)
  silkscreen extent -85,-101 -56,20
SS-SPB-4.5 [mm]
  rect 1.5x1 smd: 1(-3.15,1.5) 2(3.15,1.5) 3(3.15,-1.5) 4(-3.15,-1.5)
  silkscreen extent -2.25,-2.25 2.25,2.25
TF-CARD [mm]
  rect 1.6x0.7 smd: 1(1.82,-1.466) 2(1.82,-0.366) 3(1.82,0.734) 4(1.82,1.834) 5(1.82,2.934) 6(1.82,4.034) 7(1.82,5.134) 8(1.82,6.234) 9(1.82,7.334)
  rect 1.4x1 smd: 10(1.32,8.634)
  rect 2.2x1.2 smd: 11(-8.28,8.534) 12(-8.28,-6.966)
  rect 1.4x1.6 smd: 13(1.32,-6.066)
  Keep-Out Layer circle w0.203: c-8.68,-2.266 r0.5
  Keep-Out Layer circle w0.203: c-8.68,5.734 r0.5
  silkscreen extent -12.7,-6.37 1.12,8.13
TSOT23-8 [mm]
  rect 0.35x1.3 smd: 1(-0.975,-1.3) 2(-0.325,-1.3) 3(0.325,-1.3) 4(0.975,-1.3) 5(0.975,1.3) 6(0.325,1.3) 7(-0.325,1.3) 8(-0.975,1.3)
  silkscreen extent -2,-1.4 1.5,0.85
USB-D [mm]
  rect 1.27x1.4 hole 0.85: 1(3.5,-2.49) 5(3.5,0.13)
  oval 1.27x1.4 hole 0.85: 2(1,-2.49) 3(-1,-2.49) 4(-3.5,-2.49) 6(1,0.13) 7(-1,0.13) 8(-3.5,0.13)
  round 3.5 hole 2.3: 9(6.57,-2.84) 10(-6.57,-2.84) 11(6.57,2.84) 12(-6.57,2.84)
  silkscreen extent -7.55,-3.88 7.55,13.12
VH3.96-2P-SMT [mm]
  rect 1.2x4 smd: 0(-3,-10.5) 0(6.96,-10.5)
  rect 2.5x5 smd: 1(3.96,0) 2(0,0)
  silkscreen extent -4.06,-12.7 8,-1.52
? [mm]
  rect 2x2 smd: A(-2,0) K(2,0)
  silkscreen extent -3.2,-1.5 3.2,1.5

## Part data
BT1: library part 电池
C1 C2 C6 C7 C8 C9 C10 C11 C12 C13 C14 C15 C16 C17 C18 C19 C20 C21 C22 C23 C24 C25 C26 C27 C28 C30 C31 C32 C33 C34 C35 C37 C38 C39 C40 C41 C42 C43 C44 C45 C46 C47 C48 C49 C50 C51 C52 C53 C54 C55 C56 C149 C150: library part 电容, "电容"
C3: "Polarized Capacitor (Surface Mount)"
C4 C5 C29 C36: library part 直插电解电容, "直插电解电容"
C57 C58 C59 C60 C61 C62 C63 C64: "Capacitor"
C65 C84: library part ELECTRO
C66 C67 C68 C69 C70 C71 C72 C73 C74 C75 C76 C77 C78 C79 C80 C81 C82 C83 C85: library part CAP
D1 D2 D6 D7 D11: library part SS24
D4 D9 D10: "SCHOTTKY DIODE"
D12 D13 D14 D15: library part DIODE
F1: library part FUSE, "保险丝"
F2: library part FUSE, "贴片自恢复保险丝"
J1 J2: "ASTRON B2B Connector"
J7 J8: "USB DOUBLE PORTS"
J9: "小USB插痤"
K1 K2: library part 按键, "按键"
L1 L2: library part 功率电感
L4: library part 电感, "电感"
L7 L8 L9 L10: library part INCLUDE
P1: "Header, 15-Pin, Dual row"
P2: library part "Header 2X2", "Header, 2-Pin, Dual row"
P3: library part "Header 3", "Header, 3-Pin"
P4 P6: library part "Header 2", "Header, 2-Pin"
P5: "Header, 6-Pin"
R1 R2 R3 R4 R5 R6 R7 R8 R9 R10 R11 R12 R13 R14 R15 R16 R17 R18 R19 R20 R21 R22 R23 R24 R25 R26 R27 R28 R29 R30 R31 R32 R33 R34 R35 R36 R70 R93 R108 R109 R110 R111 R112 R113 R114 R115 R116 R117 R118 R119: library part 电阻, "电阻"
R37 R38 R39 R40 R41 R42 R43 R44: "Resistor"
R45 R46 R47 R48 R49 R50 R51 R52 R53 R54 R55 R56 R57 RS1 RS2: library part RES
U1: library part RT8251, "RT8251GSP"
U2: "MP1498DJ 2A"
U4: "HEX SCHMITT-TRIGGER INVERTERS"
U5 U8: library part MAX232ESE
U6: library part USB2514, "USB2514Bi"
U7: library part TPS2061, "TPS2061DGN"
U10: library part TPA3116D2
U24: library part MAX6369KAV+T
U25: "I2C interface RTC with crystal built-in"
X1: library part 表贴晶体, "4PIN表贴晶体"

## Via types
v1: diameter 20, hole 12, Top Layer to Bottom Layer, 20 vias
v2: diameter 30, hole 22, Top Layer to Bottom Layer, tented top, 15 vias
v3: diameter 22, hole 18, Top Layer to Bottom Layer, 6 vias

## Nets (pads, with @x,y where several pads share a name; then routed paths per layer and width w, separated by ;. In a path a pad name is that pad's centre, name@x,y a point inside that pad or via, vN(x,y) a via of type N, cw(c..) or ccw(c..) an arc to the next point about the centre after c; other vN are vias at no path point)
485_A: P2.3 R16.1 R17.2 U3.6
485_B: P2.1 R15.1 R16.2 U3.7
485_DE1: U3.2 U3.3 U4.2
+12V: C3.1 C57.1 C58.2 C59.2 D1.K F1.2 L6.1 U1.7 U9.1 U9.20
AUGND: C65.2 C66.2 C70.1 C72.2 C73.1 C76.1 C80.2 C83.2 C84.2 D12.A D13.A D14.A D15.A J2.98 R48.2 R50.2 R53.2 R54.1 R57.1 U10.1 U10.9 U10.13 U10.14 U10.15 U10.22 U10.25 U10.28
BAT_RTC: J2.94 R119.1
BG_EN: J1.73 R42.2
BG_PWM: J1.71 R40.2
CAN1_RX: J2.12
CAN1_TX: J2.10
CAN2_RX: J2.7
CAN2_TX: J2.9
CCM_CLKO2: J2.36
CLK1_N: J2.83
CLK1_P: J2.81
CSI0_HSYNCH: J2.37
CSI0_PIXCLK: J2.38
CSI_CLK0_N: J2.61
CSI_CLK0_P: J2.63
CSI_D0_N: J2.71
CSI_D0_P: J2.69
CSI_D1_N: J2.67
CSI_D1_P: J2.65
D_RXD: J6.2 U5.8
D_TXD: J6.3 U5.7
DISP0_CLK: J1.32
DISP0_CNTRST: J1.2
DISP0_DAT0: J1.26
DISP0_DAT1: J1.25
DISP0_DAT2: J1.24
DISP0_DAT3: J1.23
DISP0_DAT4: J1.22
DISP0_DAT5: J1.21
DISP0_DAT6: J1.20
DISP0_DAT7: J1.19
DISP0_DAT8: J1.18
DISP0_DAT9: J1.17
DISP0_DAT10: J1.16
DISP0_DAT11: J1.15
DISP0_DAT12: J1.14
DISP0_DAT13: J1.13
DISP0_DAT14: J1.12
DISP0_DAT15: J1.11
DISP0_DAT16: J1.10
DISP0_DAT17: J1.9
DISP0_DAT18: J1.8
DISP0_DAT19: J1.7
DISP0_DAT20: J1.6
DISP0_DAT21: J1.5
DISP0_DAT22: J1.4
DISP0_DAT23: J1.3
DISP0_DRDY: J1.30
DISP0_HSYNCH: J1.27
DISP0_VSYNCH: J1.28
EARTH: J3.BO1 J3.BO2 J5.15 J5.16 J6.BO1 J6.BO2 J7.9 J7.10 J7.11 J7.12 J8.9 J8.10 J8.11 J8.12 L3.2
ECSPI1_CLK: J1.66
ECSPI1_CS1: J1.68
ECSPI1_MISO: J1.63
ECSPI1_MOSI: J1.61
ECSPI5_CLK: J1.72
ECSPI5_CS0: J1.70
ECSPI5_MISO: J1.65
ECSPI5_MOSI: J1.67
EIM_BCLK: J1.35
EIM_CS0: J1.55
EIM_CS1: J1.56
EIM_DA0: J1.54
EIM_DA1: J1.53
EIM_DA2: J1.52
EIM_DA3: J1.51
EIM_DA4: J1.50
EIM_DA5: J1.49
EIM_DA6: J1.48
EIM_DA7: J1.47
EIM_DA8: J1.46
EIM_DA9: J1.45
EIM_DA10: J1.44
EIM_DA11: J1.43
EIM_DA12: J1.42
EIM_DA13: J1.41
EIM_DA14: J1.40
EIM_DA15: J1.39
EIM_DATA0: J2.40
EIM_DATA1: J2.39
EIM_DATA2: J2.42
EIM_DATA3: J2.41
EIM_DATA4: J2.44
EIM_DATA5: J2.43
EIM_DATA6: J2.46
EIM_DATA7: J2.45
EIM_DATA8: J2.48
EIM_DATA9: J2.47
EIM_DATA10: J2.50
EIM_DATA11: J2.49
EIM_DATA12: J2.52
EIM_DATA13: J2.51
EIM_DATA14: J2.54
EIM_DATA15: J2.53
EIM_EB0: J1.64
EIM_EB1: J1.57
EIM_LBA: J1.62
EIM_OE: J1.58
EIM_RW: J1.60
EIM_WAIT: J1.37
GAIN: R49.1 R50.1 U10.8
GND: BT1.2 C1.2 C2.2 C3.2 C5.2 C8.2 C9.2 C10.2 C12.2 C13.2 C15.2 C16.2 C17.2 C18.2 C19.2 C20.1 C21.2 C22.1 C23.2 C26.2 C27.2 C29.2 C30.1 C31.1 C32.1 C33.1 C34.1 C35.1 C36.2 C37.1 C38.1 C39.1 C40.1 C41.1 C42.1 C43.1 C44.1 C45.1 C46.1 C47.1 C48.1 C49.1 C50.1 C51.2 C52.2 C53.1 C54.1 C55.2 C57.2 C58.1 C59.1 C60.1 C61.1 C62.1 C64.1 C149.1 C150.1 D1.A D3.K D5.K D7.A D8.K J1.33 J1.38 J1.59 J1.89 J2.5 J2.6 J2.34 J2.55 J2.92 J3.5 J6.5 J7.4 J7.8 J8.4 J8.8 J9.5 J10.6 J10.10 J10.11 J10.12 J10.13 K1.1 K1.2 K2.1 K2.2 L3.1 P1.3 P1.5 P1.6 P1.13 P1.14 P1.25 P1.26 P2.2 P3.3 P4.2 P6.1 Q1.3 Q2.3 Q4.2 R1.1 R8.1 R15.2 R25.2 R26.2 R27.2 R28.1 R30.2 R37.1 R39.1 R43.2 R54.2 U1.6 U2.4 U3.5 U5.15 U6.11 U6.37 U7.1 U8.15 U9.6 U9.9 U9.11 U9.17 U9.21 U24.2 U25.11 X1.2 X1.4
  other v2: 1340,1540 1380,1540 1420,1540 1460,1540 1500,1540 1340,1580 1380,1580 1420,1580 1460,1580 1500,1580 1340,1620 1380,1620 1420,1620 1460,1620 1500,1620
  other v3: 5695,3165 5745,3165 5695,3200 5745,3200 5695,3235 5745,3235
GPIO1: R55.2
GVDD: C73.2 R45.1 R49.2 U10.6 U10.7
HDMI_CEC: J2.59
HDMI_CLK_N: J2.72
HDMI_CLK_P: J2.74
HDMI_D0_N: J2.62
HDMI_D0_P: J2.60
HDMI_D1_N: J2.68
HDMI_D1_P: J2.70
HDMI_D2_N: J2.64
HDMI_D2_P: J2.66
HDMI_HPD: J2.57
HDMI_TX_DDC_SCL: J2.58
HDMI_TX_DDC_SDA: J2.56
HPL: J2.97
HPL: C78.1
HPR: J2.99
HPR: C85.1
I2C3_SCL: J2.13 R112.1 U25.2
I2C3_SDA: J2.11 R113.1 U25.13
LED_ACT: J1.92 J5.13
LED_LINK10_100: J1.91 R14.2
LED_LINK1000: J1.90 R13.2
LVDS0_CLK_N: J2.14 P1.16
LVDS0_CLK_P: J2.16 P1.15
LVDS0_TX0_N: J2.30 P1.8
LVDS0_TX0_P: J2.32 P1.7
LVDS0_TX1_N: J2.18 P1.10
LVDS0_TX1_P: J2.20 P1.9
LVDS0_TX2_N: J2.26 P1.12
LVDS0_TX2_P: J2.28 P1.11
LVDS0_TX3_N: J2.22 P1.18
LVDS0_TX3_P: J2.24 P1.17
LVDS1_CLK_N: J2.33 P1.28
LVDS1_CLK_P: J2.31 P1.27
LVDS1_TX0_N: J2.29 P1.20
LVDS1_TX0_P: J2.27 P1.19
LVDS1_TX1_N: J2.23 P1.22
LVDS1_TX1_P: J2.25 P1.21
LVDS1_TX2_N: J2.21 P1.24
LVDS1_TX2_P: J2.19 P1.23
LVDS1_TX3_N: J2.17 P1.30
LVDS1_TX3_P: J2.15 P1.29
MIC: J2.100
MINIPCIE1V5: J2.8
MUTE: R55.1 R56.1 R57.2
NetBT1_1: BT1.1 D10.1 R119.2
NetC4_1: C4.1 D7.K L1.1 U1.8
NetC4_2: C4.2 U1.1
NetC6_1: C6.1 U8.1
NetC6_2: C6.2 U8.3
NetC7_1: C7.1 U8.2
NetC11_1: C11.1 R4.1
NetC11_2: C11.2 L2.1 U2.3
NetC14_1: C14.1 R6.1 R7.1 R8.2
NetC16_1: C16.1 R5.1 U2.6
NetC17_1: C17.1 U2.7
NetC18_1: C18.1 U2.1
NetC19_1: C19.1 J5.5 J5.6 R12.2
NetC20_2: C20.2 R12.1
NetC22_2: C22.2 D4.1 R18.1 U4.1
NetC24_1: C24.1 U5.1
NetC24_2: C24.2 U5.3
NetC25_1: C25.1 U5.2
NetC27_1: C27.1 U5.6
NetC28_1: C28.1 U5.4
NetC28_2: C28.2 U5.5
NetC31_2: C31.2 R24.2 U6.26
NetC38_2: C38.2 R31.1 U6.33 X1.1
NetC39_2: C39.2 R31.2 U6.32 X1.3
NetC45_2: C45.2 U6.34
NetC46_2: C46.2 U6.14
NetC52_1: C52.1 C53.2 C54.2 L4.2 L5.1 P1.1 P1.2 P1.4
NetC55_1: C55.1 U8.6
NetC56_1: C56.1 U8.4
NetC56_2: C56.2 U8.5
NetC60_2: C60.2 C61.2 C62.2 C63.2 D11.K P5.3 P5.4 R38.2
NetC63_1: C63.1 R37.2 R38.1 U9.16
NetC64_2: C64.2 U9.2
NetC67_1: C67.1 R47.1 RS1.1
NetC67_2: C67.2 C69.1 U10.4
NetC68_1: C68.1 U10.30
NetC68_2: C68.2 L7.1 U10.29
NetC69_2: C69.2 C71.2 U10.5
NetC71_1: C71.1 R48.1 RS1.2
NetC74_1: C74.1 U10.26
NetC74_2: C74.2 L8.1 U10.27
NetC75_1: C75.1 U10.24
NetC75_2: C75.2 L9.1 U10.23
NetC77_1: C77.1 R52.1 RS2.1
NetC77_2: C77.2 C79.1 U10.10
NetC78_2: C78.2 R51.1
NetC79_2: C79.2 C81.2 U10.11
NetC81_1: C81.1 R53.1 RS2.2
NetC82_1: C82.1 U10.20
NetC82_2: C82.2 L10.1 U10.21
NetC85_2: C85.2 R46.1
NetD2_K: D2.K F1.1
NetD3_A: D3.A R9.1
NetD5_A: D5.A R29.1
NetD6_K: D6.K R32.2 U7.2 U7.3
NetD8_A: D8.A R3.2
NetD10_3: D10.3 R116.2 U25.6
NetD11_A: D11.A L6.2 U9.18
NetJ5_11: J5.11 R10.1
NetJ5_12: J5.12 Q1.2 Q2.2
NetJ5_14: J5.14 R11.1
NetJ9_2: J9.2 R33.1
NetJ9_3: J9.3 R34.1
NetP5_1: P5.1 U9.12
NetP5_2: P5.2 U9.13
NetP5_5: P5.5 U9.14
NetP5_6: P5.6 U9.15
NetQ1_1: Q1.1 R13.1
NetQ2_1: Q2.1 R14.1
NetQ4_3: Q4.3 R117.1 U24.6
NetR1_2: R1.2 R2.2 U1.4
NetR4_2: R4.2 U2.5
NetR7_2: R7.2 U2.8
NetR19_1: R19.1 U6.27
NetR20_2: R20.2 U6.13
NetR21_2: R21.2 U6.17
NetR22_2: R22.2 U6.19
NetR23_2: R23.2 U6.21
NetR25_1: R25.1 U6.25
NetR26_1: R26.1 U6.24
NetR27_1: R27.1 U6.22
NetR28_2: R28.2 U6.35
NetR29_2: R29.2 R30.1 U6.28
NetR32_1: R32.1 U7.5
NetR39_2: R39.2 U9.3
NetR40_1: R40.1 R41.1 U9.7
NetR41_2: R41.2 R42.1 R44.1 U9.4
NetR43_1: R43.1 U9.10
NetR45_2: R45.2 U10.2 U10.3
NetR46_2: R46.2 R47.2
NetR51_2: R51.2 R52.2
NetR56_2: R56.2 U10.12
NetR70_1: R70.1 R110.1 U24.7
NetR108_1: R108.1 U24.5
NetR109_1: R109.1 U24.4
NetR114_1: R114.1 U25.12
NetR115_1: R115.1 U25.10
NetR116_1: R116.1 U25.5
NRST_E: J2.95 K1.3 K1.4 R70.2
ONOFF: J2.96 K2.3 K2.4
PCIE_RX_N: J2.75
PCIE_RX_P: J2.73
PCIE_TX_N: J2.79
PCIE_TX_P: J2.77
POR_B: D9.3 J2.35
PWM1_OUT: J1.1
RESET_B: D9.2 R93.1
SATA_RX_N: J2.82
SATA_RX_P: J2.80
SATA_TX_N: J2.76
SATA_TX_P: J2.78
SD2_CD: J1.82 J10.9 R36.1
SD2_CLK: J1.85 J10.5
SD2_CMD: J1.84 J10.3 R35.1
SD2_DATA0: J1.88 J10.7
SD2_DATA1: J1.83 J10.8
SD2_DATA2: J1.87 J10.1
SD2_DATA3: J1.86 J10.2
SD3_CMD: J1.77
SD3_DATA0: J1.80
SD3_DATA1: J1.74 Q4.1 R118.1
SD3_DATA2: J1.76 R111.1 U24.1
SD3_DATA3: J1.75
SD3_DATA4: J1.79
SD3_DATA5: J1.78
SD3_DATA6: J1.81
SD3_DATA7: J1.69
SPEAK1+: C76.2 D14.K L9.2 P8.2
SPEAK1-: C80.1 D15.K L10.2 P8.1
SPEAK2+: C70.2 D12.K L7.2 P7.2
SPEAK2-: C72.1 D13.K L8.2 P7.1
TRX0_N: J1.100 J5.2
TRX0_P: J1.98 J5.1
TRX1_N: J1.96 J5.4
TRX1_P: J1.94 J5.3
TRX2_N: J1.97 J5.8
TRX2_P: J1.99 J5.7
TRX3_N: J1.93 J5.10
TRX3_P: J1.95 J5.9
TXD8: D4.3 R18.2
U2_RXD: J3.2 U8.8
U2_TXD: J3.3 U8.7
UART1_RX: J2.84 P3.1 U5.9
UART1_TX: J2.86 P3.2 U5.10
UART2_RX: J1.31 U8.9
UART2_TX: J1.29 U8.10
UART3_RX: J1.34 U3.1
UART3_TX: J1.36 U3.4
USB_H1_D_N: J2.91 U6.30
USB_H1_D_P: J2.93 U6.31
USB_H1_OC: J2.90
USB_OTG_D_N: J2.89 R33.2
USB_OTG_D_P: J2.87 R34.2
USB_OTG_ID: J2.88 J9.4 U7.4
USB_OTG_VBUS: C47.2 C48.2 C49.2 J2.85 J9.1 U7.6 U7.7 U7.8
USB_PORT1_N: J7.2 U6.1
USB_PORT1_P: J7.3 U6.2
USB_PORT2_N: J7.6 U6.3
USB_PORT2_P: J7.7 U6.4
USB_PORT3_N: J8.2 U6.6
USB_PORT3_P: J8.3 U6.7
USB_PORT4_N: J8.6 U6.8
USB_PORT4_P: J8.7 U6.9
VBUS: C29.1 C30.2 C36.1 C37.2 F2.2 J7.1 J7.5 J8.1 J8.5
VCC3V3: C7.2 C8.1 C12.1 C13.1 C14.2 C15.1 C25.2 C26.1 C32.2 C33.2 C34.2 C35.2 C40.2 C41.2 C42.2 C43.2 C44.2 C50.2 C51.1 C149.2 C150.2 D10.2 J10.4 L2.2 L5.2 R6.2 R9.2 R10.2 R11.2 R19.2 R24.1 R35.2 R36.2 R44.2 R93.2 R108.2 R109.2 R110.2 R111.2 R112.2 R113.2 R114.2 R115.2 R117.2 R118.2 U5.16 U6.5 U6.10 U6.15 U6.23 U6.29 U6.36 U8.16 U24.8
VCC5V: C1.1 C2.1 C5.1 C9.1 C10.1 C21.1 C23.1 D6.A F2.1 J2.1 J2.2 J2.3 J2.4 L1.2 L4.1 R2.1 R3.1 R5.2 R17.1 R20.1 R21.1 R22.1 R23.1 U2.2 U3.8
VIN: C65.1 C66.1 C83.1 C84.1 D2.A P2.4 P4.1 P6.2 U10.17 U10.18 U10.19 U10.31 U10.32
pads on no net: D4.2 D9.1 J3.1 J3.4 J3.6 J3.7 J3.8 J3.9 J6.1 J6.4 J6.6 J6.7 J6.8 J6.9 J9.0 P4.0 P5.0 P7.0 P8.0 U1.2 U1.3 U1.5 U4.3 U4.4 U4.5 U4.6 U4.7 U4.8 U4.9 U4.10 U4.11 U4.12 U4.13 U4.14 U5.11 U5.12 U5.13 U5.14 U6.12 U6.16 U6.18 U6.20 U7.9 U8.11 U8.12 U8.13 U8.14 U9.5 U9.8 U9.19 U10.16 U10.33 U24.3 U25.1 U25.3 U25.4 U25.7 U25.8 U25.9 U25.14
copper on no net:
  other v1: 2130,2270 2170,2270 2210,2270 2250,2270 2130,2300 2170,2300 2210,2300 2250,2300 2130,2330 2170,2330 2210,2330 2250,2330 2130,2360 2170,2360 2210,2360 2250,2360 2130,2390 2170,2390 2210,2390 2250,2390

## Polygon pours and split planes (outlines as drawn)
VIN on Top Layer "Top Layer-No Net 1" (solid, remove dead copper): 6470,2640 6730,2640 6730,2030 6730,2010 6340,2010 6340,2300 6366,2320 6522,2320 6522,2500.53 6548,2520.53
VIN on Top Layer "Top Layer-No Net 1" (solid, remove dead copper): 6270,3000 6270,2480 6500,2480 6500,2700 6480,2720 6470,2720 6470,2820 6520,2870 6540,2890 6540,3000

## Other copper
Top Layer:
  region net VIN: 6550,2500 6480,2500 6480,2310 6550,2310
  rectangle net VIN: 6430.99,2880 6520,2937.99
  rectangle net VIN: 6380,2891.06 6540,3000
  rectangle net VIN: 6350,2020 6620,2180
  rectangle net VIN: 6310,2510 6490,2660
  rectangle net VIN: 6475,2480 6570,2610

## Text inside footprints (layer, text, board x,y; h text height)
J3: Top Overlay "9" at 1550,3821.67 h30 r90; Top Overlay "5" at 1650,3801.67 h30 r90; Top Overlay "1" at 1650,4401.67 h30 r90; Top Overlay "6" at 1550,4381.67 h30 r90
J6: Top Overlay "9" at 6218.33,1450 h30 r180; Top Overlay "5" at 6238.33,1550 h30 r180; Top Overlay "1" at 5638.33,1550 h30 r180; Top Overlay "6" at 5658.33,1450 h30 r180
U3: Top Overlay "1" at 11316.06,6591.77 h25.59 r270
U4: Top Overlay "1" at 9865,6595 h30 r270
U5: Top Overlay "1" at 9322.24,6593.09 h30 r270
U8: Top Overlay "1" at 9787.24,3588.09 h30 r270
U25: Top Overlay "1" at 9828.42,12580 h30 r270